# EAGLE board BATCH_V1_2 (EAGLE 6.4)
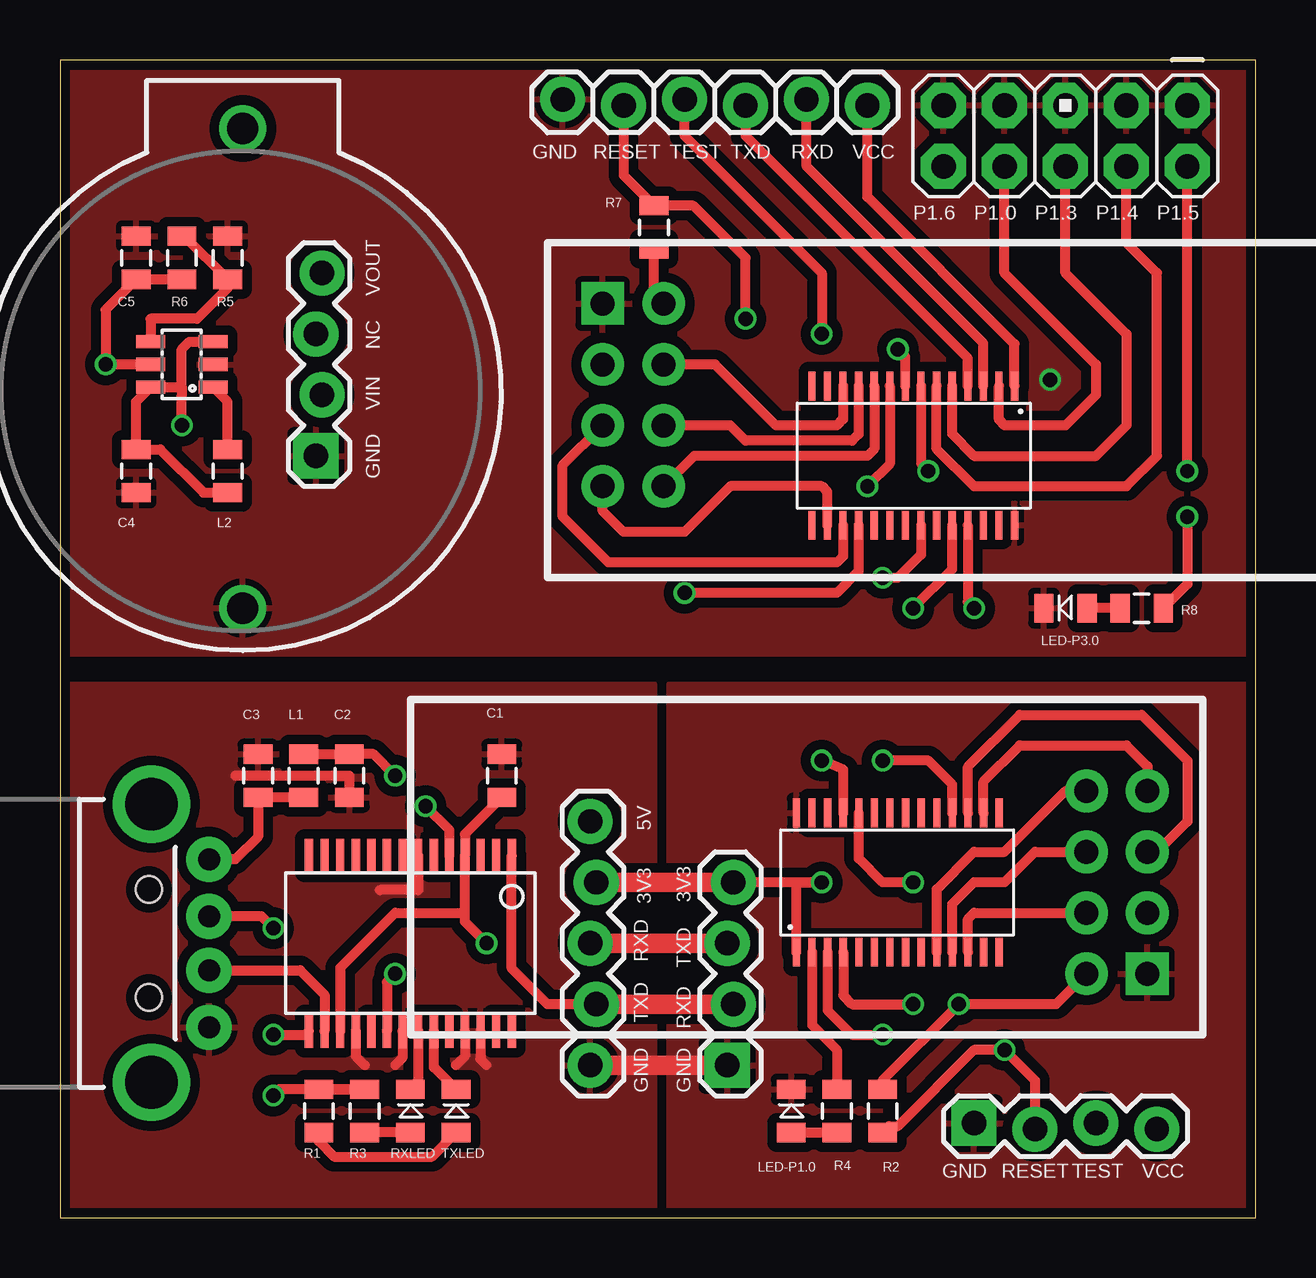
[diagram p0: board, top side]
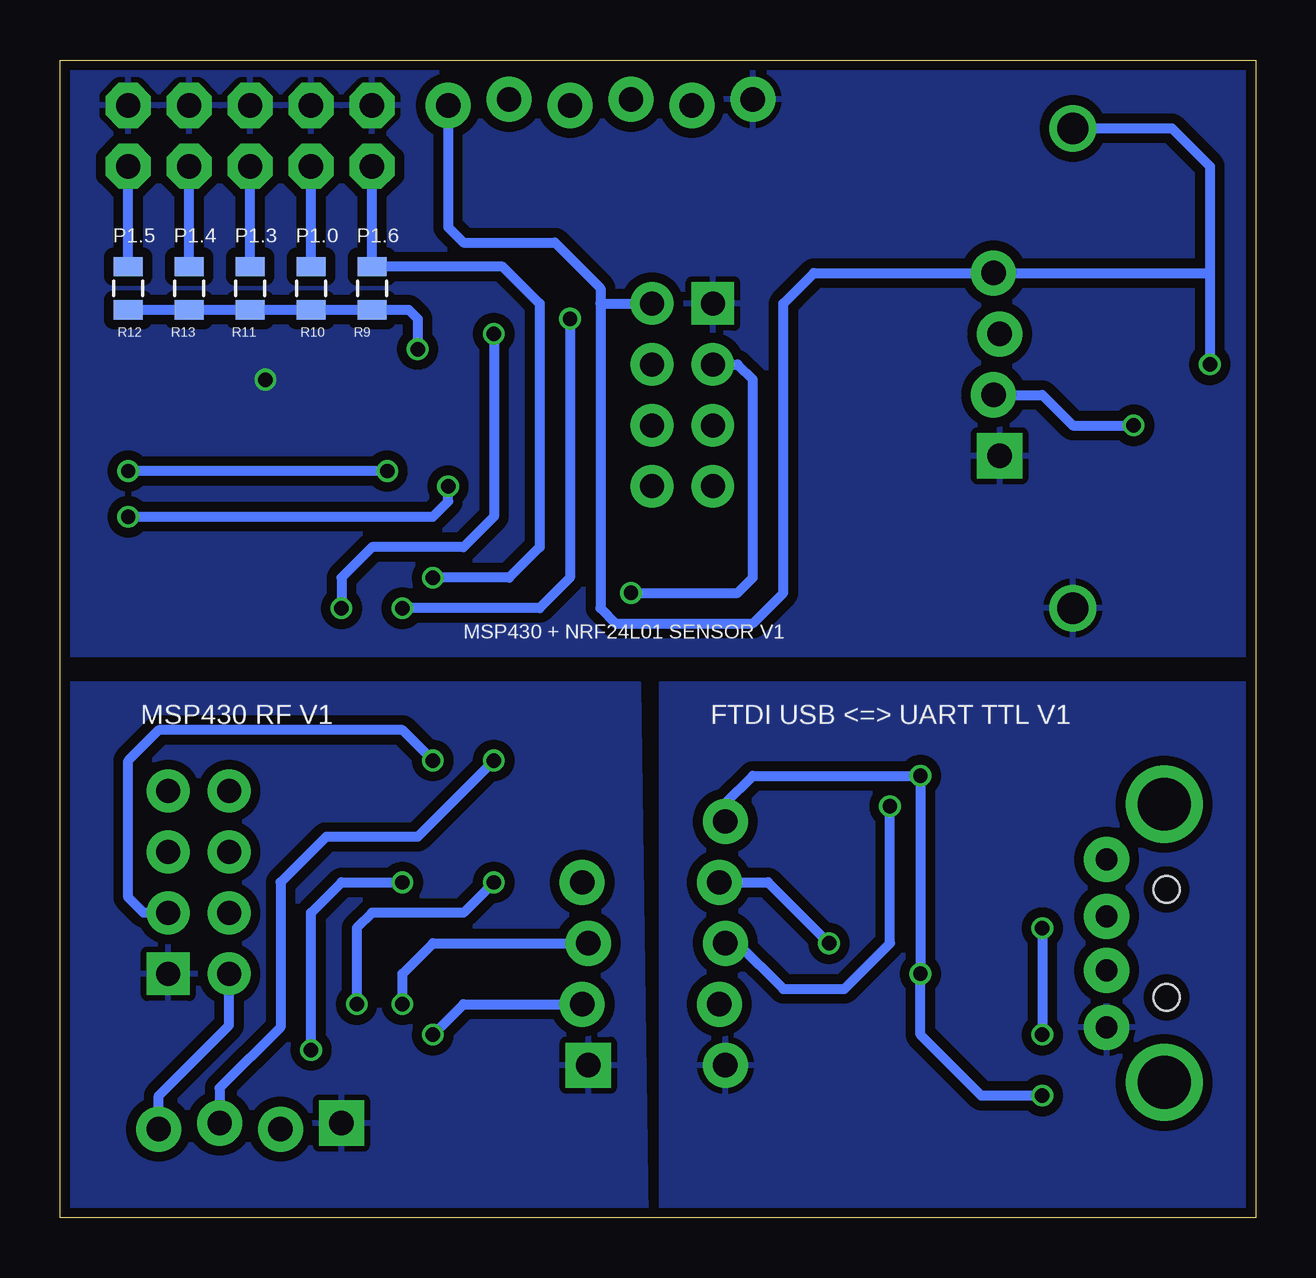
[diagram p1: board, bottom side, seen from below]

Size 49.84 x 48.25 mm. Coordinates in mm from the lower left corner, seen from the top.
Outline: 0,48.25 0,0 49.84,0 49.84,48.25 0,48.25
Copper layers (1*2*15*16): Top 0.035mm / dielectric 0.2mm / layer 2 0.0175mm / dielectric 1.1mm / layer 15 0.0175mm / dielectric 0.2mm / Bottom 0.035mm
Design rules "SeeedStudio_DRU_no_angle_20130527": minimum track width 6mil, minimum drill 12mil, track to track 6mil, track to pad 6mil, pad to pad 6mil, via to via 6mil, smd to smd 0mil, copper to edge 10mil, drill to drill 10mil, minimum pad ring 6mil, minimum via ring 6mil, stop-mask expansion 2mil, vias tented up to drill 25mil, thermal gap 10mil

## Footprints (pad centres in the part's own frame; a part is rotated, then mirrored left to right if it is on the bottom)
BATTCOM_20MM_PTH = drill 1.3: 1 20,0; 2 0,0
0805 = smd 0.8 x 1.2: 1 -0.9,0; 2 0.9,0
1X04_LOCK = drill 1.016 pad 1.88 square: 1 0,0.127 | drill 1.016 pad 1.88: 2 2.54,-0.127; 3 5.08,0.127; 4 7.62,-0.127
1X05_LOCK = drill 1.016 pad 1.88: 1 0,0.127; 2 2.54,-0.127; 3 5.08,0.127; 4 7.62,-0.127; 5 10.16,0.127
USB-A-H = drill 0.914 pad 1.88: D+ 2.4,1.127; D- 2.4,-1.127; GND 2.4,3.5; VBUS 2.4,-3.5 | drill 2.2: GND2 0,-5.8; GND3 0,5.8 | hole 1.1: -0.1,2.25; -0.1,-2.25
AVR_ICSP = drill 1.016 pad 1.88 octagon: 1 -1.27,5.08; 2 1.27,5.08; 3 -1.27,2.54; 4 1.27,2.54; 5 -1.27,0; 6 1.27,0; 7 -1.27,-2.54; 8 1.27,-2.54; 9 -1.27,-5.08; 10 1.27,-5.08
1X06_LOCK = drill 1.016 pad 1.88: 1 0,0; 2 2.54,-0.254; 3 5.08,0; 4 7.62,-0.254; 5 10.16,0; 6 12.7,-0.254
LED-0805 = smd 0.8 x 1.2: A -0.9,0; C 0.9,0
NRF24L01-4X2 = drill 1 pad 1.778 square: 1 -11.67,3.81 | drill 1 pad 1.778: 2 -9.13,3.81; 3 -11.67,1.27; 4 -9.13,1.27; 5 -11.67,-1.27; 6 -9.13,-1.27; 7 -11.67,-3.81; 8 -9.13,-3.81
SSOP28DB = smd 0.348 x 1.397: 1 -4.225,-3.656; 2 -3.575,-3.656; 3 -2.925,-3.656; 4 -2.275,-3.656; 5 -1.625,-3.656; 6 -0.975,-3.656; 7 -0.325,-3.656; 8 0.325,-3.656; 9 0.975,-3.656; 10 1.625,-3.656; 11 2.275,-3.656; 12 2.925,-3.656; 13 3.575,-3.656; 14 4.225,-3.656; 15 4.225,3.656; 16 3.575,3.656; 17 2.925,3.656; 18 2.275,3.656; 19 1.625,3.656; 20 0.975,3.656; 21 0.325,3.656; 22 -0.325,3.656; 23 -0.975,3.656; 24 -1.625,3.656; 25 -2.275,3.656; 26 -2.925,3.656; 27 -3.575,3.656; 28 -4.225,3.656
PW28 = smd 0.3 x 1.2: 1 -4.229,-2.908; 2 -3.579,-2.908; 3 -2.929,-2.908; 4 -2.279,-2.908; 5 -1.629,-2.908; 6 -0.979,-2.908; 7 -0.329,-2.908; 8 0.321,-2.908; 9 0.971,-2.908; 10 1.621,-2.908; 11 2.271,-2.908; 12 2.921,-2.908; 13 3.571,-2.908; 14 4.221,-2.908; 15 4.221,2.892; 16 3.571,2.892; 17 2.921,2.892; 18 2.271,2.892; 19 1.621,2.892; 20 0.971,2.892; 21 0.321,2.892; 22 -0.329,2.892; 23 -0.979,2.892; 24 -1.629,2.892; 25 -2.279,2.892; 26 -2.929,2.892; 27 -3.579,2.892; 28 -4.229,2.892
SOT23-6L = smd 0.55 x 1.2: 1 -0.95,-1.3; 2 0,-1.3; 3 0.95,-1.3; 4 0.95,1.3; 5 0,1.3; 6 -0.95,1.3

## Placement (x,y rotation side)
BAT1  [BATTCOM_20MM_PTH]  7.62,25.4 90 top
C1  0.1uF  [0805]  18.41,18.41 90 top
C2  10uF  [0805]  12.06,18.41 270 top
C3  0.1uF  [0805]  8.26,18.41 90 top
C4  [0805]  3.17,31.11 270 top
C5  [0805]  3.17,40.01 90 top
JP1  [1X04_LOCK]  10.79,31.75 90 top
JP2  [1X05_LOCK]  22.23,6.35 90 top
JP3  USB-B  [USB-A-H]  3.81,11.43 0 top
JP4  [1X04_LOCK]  38.1,3.81 0 top
JP5  [1X04_LOCK]  27.94,6.35 90 top
JP6  M05X2PTH  [AVR_ICSP]  41.91,45.09 270 top
JP7  [1X06_LOCK]  33.66,46.35 180 top
L1  [0805]  10.16,18.41 90 top
L2  [0805]  6.99,31.11 90 top
LED-P1.0  [LED-0805]  30.48,4.45 90 top
LED-P3.0  [LED-0805]  41.91,25.4 180 top
R1  330  [0805]  10.79,4.45 270 top
R2  47K  [0805]  34.29,4.45 90 top
R3  330  [0805]  12.7,4.45 270 top
R4  220  [0805]  32.38,4.45 270 top
R5  [0805]  6.99,40.01 270 top
R6  [0805]  5.08,40.01 270 top
R7  47K  [0805]  24.77,41.27 270 top
R8  220  [0805]  45.09,25.4 180 top
R9  47K  [0805]  36.83,38.73 90 bottom
R10  47K  [0805]  39.37,38.73 90 bottom
R11  47K  [0805]  41.91,38.73 90 bottom
R12  47K  [0805]  46.99,38.73 90 bottom
R13  47K  [0805]  44.45,38.73 90 bottom
RXLED  [LED-0805]  14.61,4.45 90 top
TXLED  [LED-0805]  16.51,4.45 90 top
U1  NRF24L01-4X2  [NRF24L01-4X2]  33.66,13.97 180 top
U2  FT232RL-BASICSSOP  [SSOP28DB]  14.61,11.43 180 top
U3  NRF24L01-4X2  [NRF24L01-4X2]  34.29,34.29 0 top
U$1  MSP430G2553  [PW28]  34.92,13.97 0 top
U$2  TLV61220  [SOT23-6L]  5.08,35.56 90 top
U$3  MSP430G2553  [PW28]  35.56,31.75 180 top

## Library data of the parts
BAT1 = SparkFun-Electromechanical
C1-C3 = SparkFun-Capacitors
C4 C5 L1 L2 R1 R3 R5 R6 = SparkFun-Passives
JP1-JP7 = SparkFun-Connectors
LED-P1.0 LED-P3.0 RXLED TXLED U$2 = custom
R2 R4 R7-R13 = SparkFun-Resistors
U1 U3 = untitled
U2 = SparkFun-DigitalIC
U$1 U$3 = TI_MSP430_v16

## Nets
5V: C2.1 JP2.5 L1.2 R1.1 R3.1 U2.20
GND: C1.2 C2.2 C3.2 JP2.1 JP3.VBUS JP4.1 JP5.1 LED-P1.0.C U1.1 U2.7 U2.18 U2.21 U2.25 U2.26 U$1.28
GND1: BAT1.2 C4.2 C5.2 JP1.1 JP6.1 JP6.3 JP6.5 JP6.7 JP6.9 JP7.6 LED-P3.0.C R5.1 U3.1 U$2.2 U$3.28
N$1: U1.3 U$1.18
N$2: U1.5 U$1.17
N$3: U1.7 U$1.16
N$4: R4.1 U$1.2
N$5: U1.6 U$1.11
N$6: U1.4 U$1.12
N$7: U1.8 U$1.10
N$8: LED-P1.0.A R4.2
N$9: L2.2 U$2.1
N$10: R1.2 TXLED.A
N$11: R5.2 R6.1 U$2.4
N$12: LED-P3.0.A R8.2
N$13: R3.2 RXLED.A
N$14: RXLED.C U2.22
N$15: TXLED.C U2.23
N$16: C3.1 JP3.GND L1.1
N$17: U3.3 U$3.18
N$18: U3.5 U$3.17
N$19: U3.7 U$3.16
N$20: U3.6 U$3.11
N$21: U3.4 U$3.12
N$22: U3.8 U$3.10
N$23: R8.1 U$3.9
N$24: R9.1 R10.1 R11.1 R12.1 R13.1 U$3.8
P1.0: JP6.8 R10.2 U$3.2
P1.3: JP6.6 R11.2 U$3.5
P1.4: JP6.4 R13.2 U$3.6
P1.5: JP6.2 R12.2 U$3.7
P1.6: JP6.10 R9.2 U$3.22
RESET: JP4.2 R2.1 U$1.24
RESET1: JP7.5 R7.1 U$3.24
RX: JP2.3 JP5.3 U2.5 U$1.4
RXD: JP7.2 U$3.3
TEST: JP4.3 U$1.25
TEST1: JP7.4 U$3.25
TX: JP2.2 JP5.2 U2.1 U$1.3
TXD: JP7.3 U$3.4
USBDM: JP3.D- U2.16
USBDP: JP3.D+ U2.15
VCC: C1.1 JP2.4 JP4.4 JP5.4 R2.2 U1.2 U2.4 U2.17 U$1.1
VCC1: BAT1.1 C5.1 JP1.4 JP7.1 R6.2 R7.2 U3.2 U$2.5 U$3.1
VIN: C4.1 JP1.2 L2.1 U$2.3 U$2.6

## Tracks (layer width: path | path; a pad name or v marks a point on that pad's centre or on a via)
5V  (via drill 0.6)
  Top 0.406: L1.2 C2.1 | C2.1 11.8,19.32 | v13.97,10.16 13.63,9.82 U2.20 | R1.1 R3.1 9.15,5.34 v8.89,5.08 | v13.97,18.41 13.07,19.32 C2.1
  Bottom 0.406: v8.89,5.08 11.43,5.08 13.97,7.62 v13.97,10.16 v13.97,18.41 20.95,18.41 22.1,17.27 JP2.5
GND
  Top 0.406: U2.18 12.33,6.72 12.7,6.35 | U2.21 14.28,6.66 13.97,6.35 | U2.26 17.53,6.6 17.78,6.35 | U2.25 16.88,6.72 16.51,6.35 | U2.7 14.93,13.65 13.34,13.65 | C2.2 12.06,18.41 7.3,18.41
  Top 0.813: JP2.1 JP5.1
  pour Bottom (isolate 0.406, rank 3): 0,0 0,22.23 24.77,22.23 24.77,0
  pour Top (isolate 0.406): 0,22.23 24.77,22.23 24.77,0 0,0
  pour Top (isolate 0.406): 49.53,0 25.4,0 25.4,22.23 49.53,22.23
  pour Bottom (isolate 0.406, rank 3): 49.53,0 25.4,0 25.72,22.23 49.85,22.23
GND1  (via drill 0.6)
  other vias: 41.27,34.92
  pour Top (isolate 0.406): 0,48.26 49.53,48.26 49.53,23.5 0,23.5
  pour Bottom (isolate 0.406): 0,48.26 49.53,48.26 49.53,23.5 0,23.5
N$1  (via drill 0.6)
  Top 0.406: U$1.18 37.2,18.05 36.2,19.05 v34.29,19.05
  Bottom 0.406: v34.29,19.05 35.56,20.32 45.72,20.32 46.99,19.05 46.99,13.34 46.35,12.7 U1.3
N$2
  Top 0.406: U$1.17 37.85,18.8 40.01,20.95 45.09,20.95 46.99,19.05 46.99,16.51 45.72,15.24 U1.5
N$3
  Top 0.406: U$1.16 38.5,18.18 40.01,19.68 44.45,19.68 45.33,18.81 U1.7
N$4
  Top 0.406: U$1.2 31.35,8.02 32.38,6.99 R4.1
N$5
  Top 0.406: U$1.11 37.2,13.07 38.1,13.97 39.37,13.97 40.64,15.24 U1.6
N$6
  Top 0.406: U$1.12 37.85,12.45 38.1,12.7 U1.4
N$7
  Top 0.406: U$1.10 36.55,13.69 38.1,15.24 39.37,15.24 41.91,17.78 U1.8
N$8
  Top 0.406: LED-P1.0.A R4.2
N$9
  Top 0.406: L2.2 6.99,34.01 U$2.1
N$10
  Top 0.406: R1.2 10.79,3.17 11.43,2.54 15.51,2.54 TXLED.A
N$11
  Top 0.406: U$2.4 3.78,37.47 5.71,37.47 6.99,38.73 R5.2 5.18,40.91 R6.1
N$12
  Top 0.406: R8.2 LED-P3.0.A
N$13
  Top 0.406: RXLED.A R3.2
N$14
  Top 0.406: U2.22 14.93,5.67 RXLED.C
N$15
  Top 0.406: U2.23 15.58,6.24 15.62,6.24 TXLED.C
N$16
  Top 0.406: L1.1 C3.1 8.26,15.88 7.31,14.93 JP3.GND
N$17  (via drill 0.6)
  Top 0.406: U$3.18 33.29,26.94 32.38,26.04 v26.04,26.04
  Bottom 0.406: v26.04,26.04 21.59,26.04 20.95,26.67 20.95,34.92 21.59,35.56 U3.3
N$18
  Top 0.406: U$3.17 32.64,27.56 32.38,27.3 22.86,27.3 20.95,29.21 20.95,31.36 U3.5
N$19
  Top 0.406: U$3.16 31.99,30.24 31.75,30.48 27.94,30.48 26.04,28.57 23.5,28.57 22.62,29.45 U3.7
N$20
  Top 0.406: U$3.11 33.29,32.65 33.02,32.38 28.57,32.38 27.94,33.02 U3.6
N$21
  Top 0.406: U$3.12 32.64,33.27 32.38,33.02 29.84,33.02 27.3,35.56 U3.4
N$22
  Top 0.406: U$3.10 33.94,32.03 33.66,31.75 26.43,31.75 U3.8
N$23  (via drill 0.6)
  Top 0.406: U$3.9 34.59,31.41 v33.66,30.48 | v46.99,29.21 46.99,26.41 R8.1
  Bottom 0.406: v46.99,29.21 34.29,29.21 33.66,29.84 v33.66,30.48
N$24  (via drill 0.6)
  Top 0.406: U$3.8 35.24,35.88 v34.92,36.2
  Bottom 0.406: R12.1 R13.1 R11.1 R10.1 R9.1 35.3,37.84 34.92,37.47 v34.92,36.2
P1.0
  Top 0.406: U$3.2 39.14,33.25 39.37,33.02 41.91,33.02 43.18,34.29 43.18,35.56 39.37,39.37 JP6.8
  Bottom 0.406: R10.2 JP6.8
P1.3
  Top 0.406: U$3.5 37.19,32.66 38.1,31.75 43.18,31.75 44.45,33.02 44.45,36.83 41.91,39.37 JP6.6
  Bottom 0.406: R11.2 JP6.6
P1.4
  Top 0.406: U$3.6 36.54,32.04 38.1,30.48 44.45,30.48 45.72,31.75 45.72,39.37 44.45,40.64 JP6.4
  Bottom 0.406: R13.2 JP6.4
P1.5  (via drill 0.6)
  Top 0.406: U$3.7 35.89,31.44 v36.2,31.11 | v46.99,31.11 JP6.2
  Bottom 0.406: v36.2,31.11 v46.99,31.11 | R12.2 JP6.2
P1.6  (via drill 0.6)
  Top 0.406: U$3.22 35.89,27.63 34.92,26.67 v34.29,26.67
  Bottom 0.406: v34.29,26.67 31.11,26.67 29.84,27.94 29.84,38.1 31.38,39.63 R9.2 JP6.10
RESET  (via drill 0.6)
  Top 0.406: v35.56,13.97 34.29,13.97 33.3,14.96 U$1.24 | 34.66,3.54 R2.1 34.55,3.81 34.92,3.81 38.1,6.99 v39.37,6.99 40.64,5.71 JP4.2
  Bottom 0.406: v39.37,6.99 39.37,12.7 38.1,13.97 v35.56,13.97
RESET1  (via drill 0.6)
  Top 0.406: v35.56,25.4 37.19,27.03 U$3.24 | v28.57,37.47 28.57,40.01 26.41,42.17 R7.1 23.5,43.45 JP7.5
  Bottom 0.406: v28.57,37.47 28.57,26.67 29.84,25.4 v35.56,25.4
RX  (via drill 0.6)
  Top 0.406: U$1.4 32.65,9.26 33.02,8.89 v35.56,8.89 | U2.5 16.23,16.16 v15.24,17.14
  Top 0.813: JP5.3 JP2.3
  Bottom 0.406: v35.56,8.89 35.56,10.16 34.29,11.43 JP5.3 | v15.24,17.14 15.24,11.43 17.14,9.53 19.68,9.53 21.59,11.43 JP2.3
RXD
  Top 0.406: U$3.3 38.49,36.44 31.11,43.81 JP7.2
TEST  (via drill 0.6)
  Top 0.406: U$1.25 32.65,18.68 v31.75,19.05
  Bottom 0.406: v31.75,19.05 34.92,15.88 38.73,15.88 40.64,13.97 40.64,7.94 43.18,5.4 JP4.3
TEST1  (via drill 0.6)
  Top 0.406: U$3.25 37.84,25.66 v38.1,25.4 | JP7.4 26.04,45.09 31.75,39.37 v31.75,36.83
  Bottom 0.406: v31.75,36.83 31.75,29.21 33.02,27.94 36.83,27.94 38.1,26.67 v38.1,25.4
TX  (via drill 0.6)
  Top 0.406: U$1.3 32,8.64 33.02,7.62 v34.29,7.62 | JP2.2 20.32,8.89 18.83,10.38 U2.1
  Top 0.813: JP2.2 JP5.2
  Bottom 0.406: v34.29,7.62 33.02,8.89 JP5.2
TXD
  Top 0.406: U$3.4 37.84,35.82 28.57,45.09 JP7.3
USBDM
  Top 0.406: U2.16 11.03,9.29 10.02,10.3 JP3.D-
USBDP  (via drill 0.6)
  Top 0.406: v8.89,7.62 10.23,7.62 U2.15 | v8.89,12.06 8.4,12.56 JP3.D+
  Bottom 0.406: v8.89,12.06 v8.89,7.62
VCC  (via drill 0.6)
  Top 0.406: U2.17 11.68,10.41 13.97,12.7 16.88,12.7 U2.4 | 27.79,13.97 JP5.4 v31.75,13.97 30.7,13.97 U$1.1 | v17.78,11.43 16.88,12.33 U2.4 | U1.2 41.52,8.89 v37.47,8.89 34.29,5.71 R2.2 | C1.1 16.88,15.98 U2.4
  Top 0.813: JP2.4 JP5.4
  Bottom 0.406: v31.75,13.97 33.02,12.7 36.83,12.7 37.47,12.06 v37.47,8.89 | JP2.4 20.32,13.97 v17.78,11.43 | JP4.4 45.72,5.08 42.78,8.02 U1.2
VCC1  (via drill 0.6)
  Top 0.406: R6.2 C5.1 1.91,37.84 v1.91,35.56 U$2.5 | U$3.1 39.79,36.41 33.66,42.55 JP7.1 | U3.2 24.77,38.49 R7.2
  Bottom 0.406: JP7.1 33.66,41.27 33.02,40.64 29.21,40.64 27.3,38.73 27.3,38.1 | BAT1.1 3.49,45.4 1.91,43.81 1.91,39.37 | 1.91,39.37 v1.91,35.56 | 27.3,38.1 27.3,25.4 26.67,24.77 20.95,24.77 19.68,26.04 19.68,38.1 18.41,39.37 JP1.4 1.91,39.37 | 27.3,38.1 U3.2
VIN  (via drill 0.6)
  Top 0.406: L2.1 5.98,30.21 4.18,32.02 C4.1 3.17,34.01 U$2.6 5.08,34.61 | U$2.3 5.39,36.51 5.08,36.2 5.08,34.61 | v5.08,33.02 5.08,34.29 5.08,34.61
  Bottom 0.406: JP1.2 8.89,34.29 7.62,33.02 v5.08,33.02

## Text on the board
tPlace: GND | RESET | TEST | TXD | RXD | VCC | P1.6 | P1.0 | P1.3 | P1.4 | P1.5 | VOUT | NC | VIN | GND | 5V | 3V3 | 3V3 | RXD | TXD | TXD | RXD | GND | GND | GND | RESET | TEST | VCC
bPlace: P1.6 | P1.0 | P1.3 | P1.4 | P1.5 | MSP430 + NRF24L01 SENSOR V1 | FTDI USB <=> UART TTL V1 | MSP430 RF V1